# EAGLE board terminal - eagle (EAGLE 4.09)
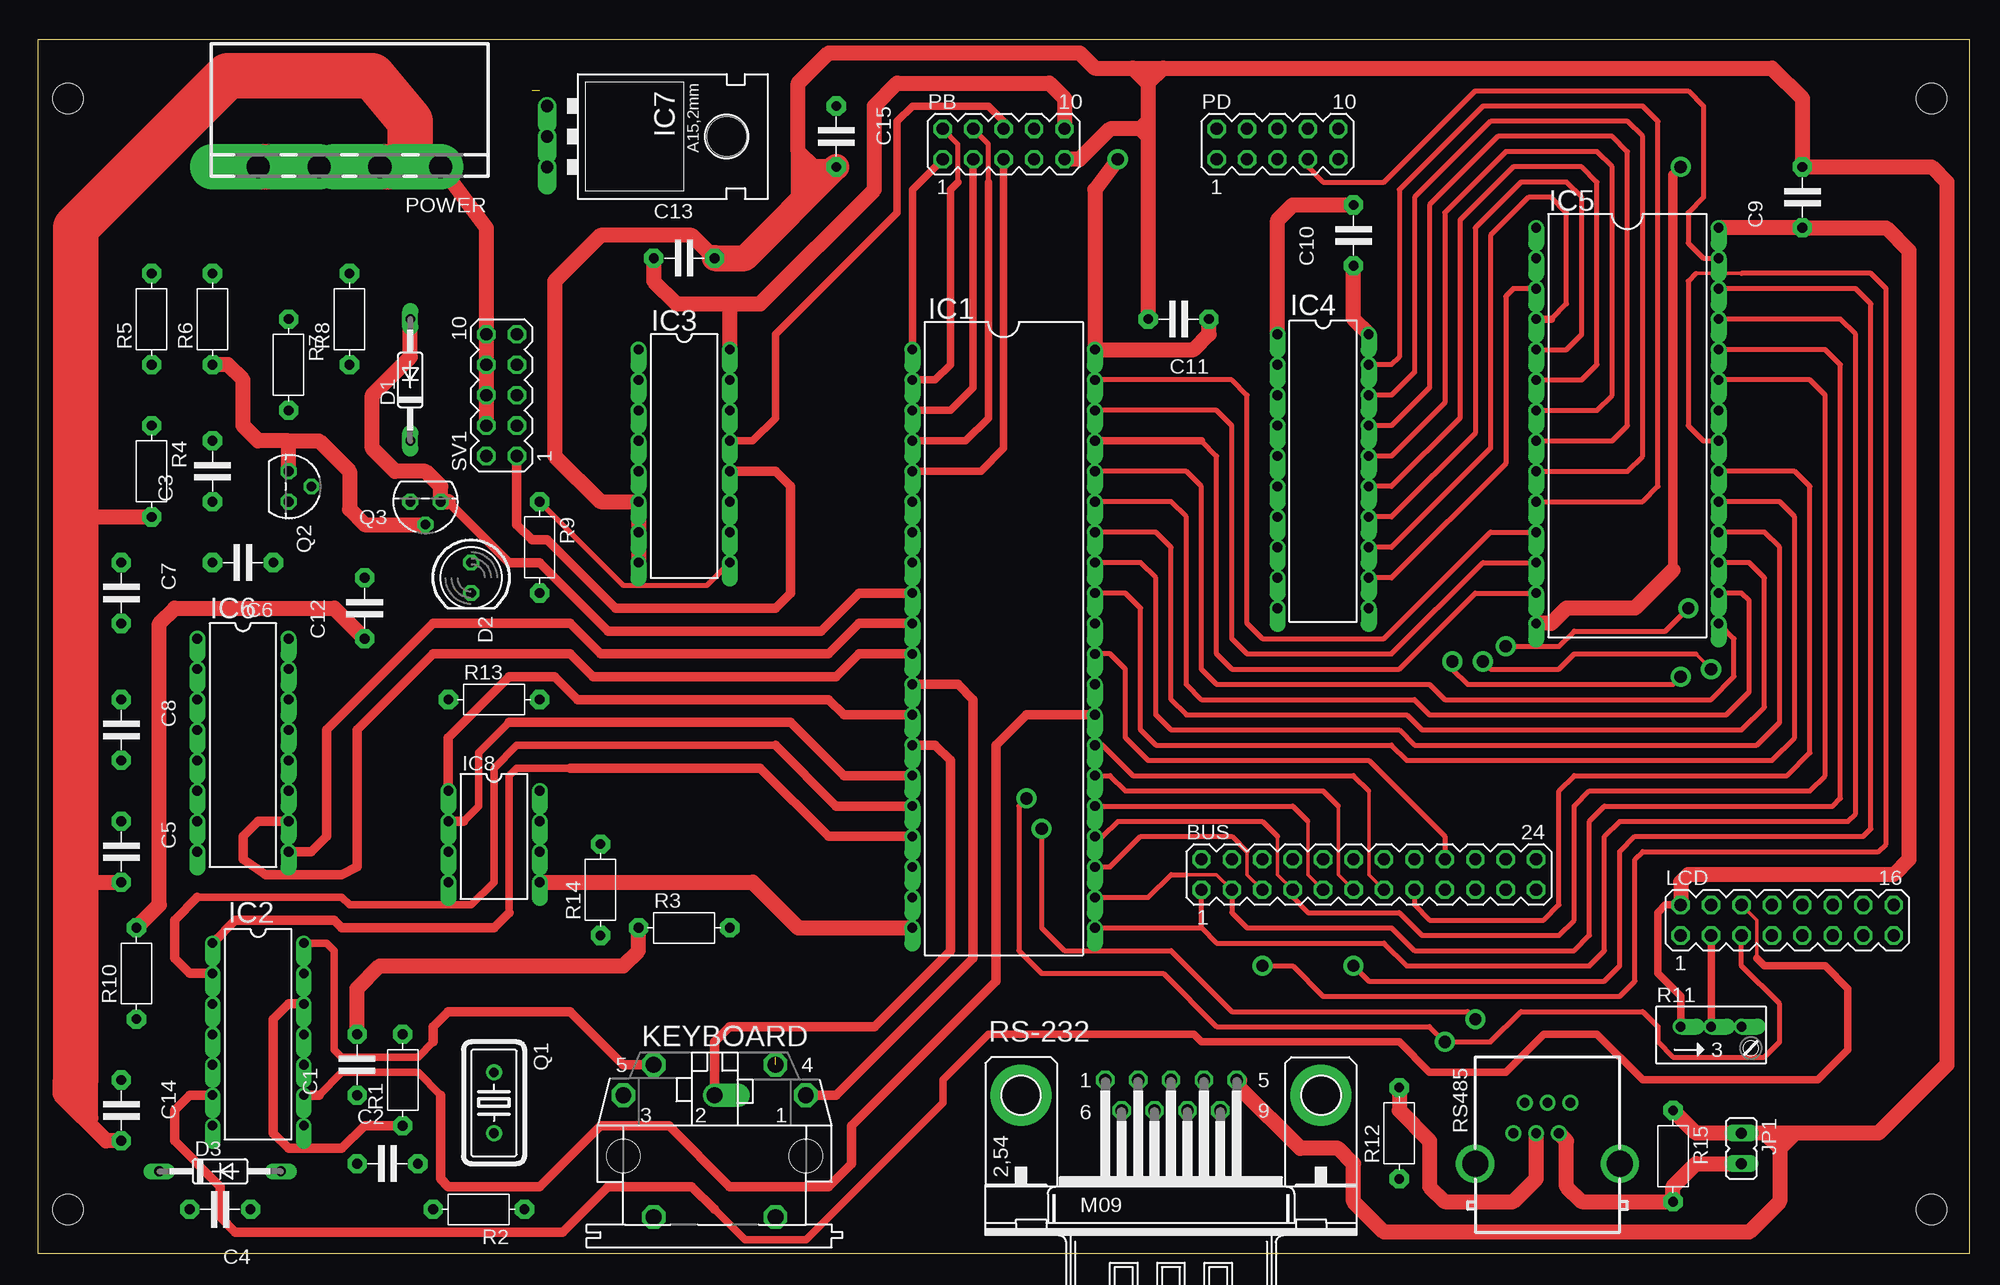
[diagram p0: board, top side]
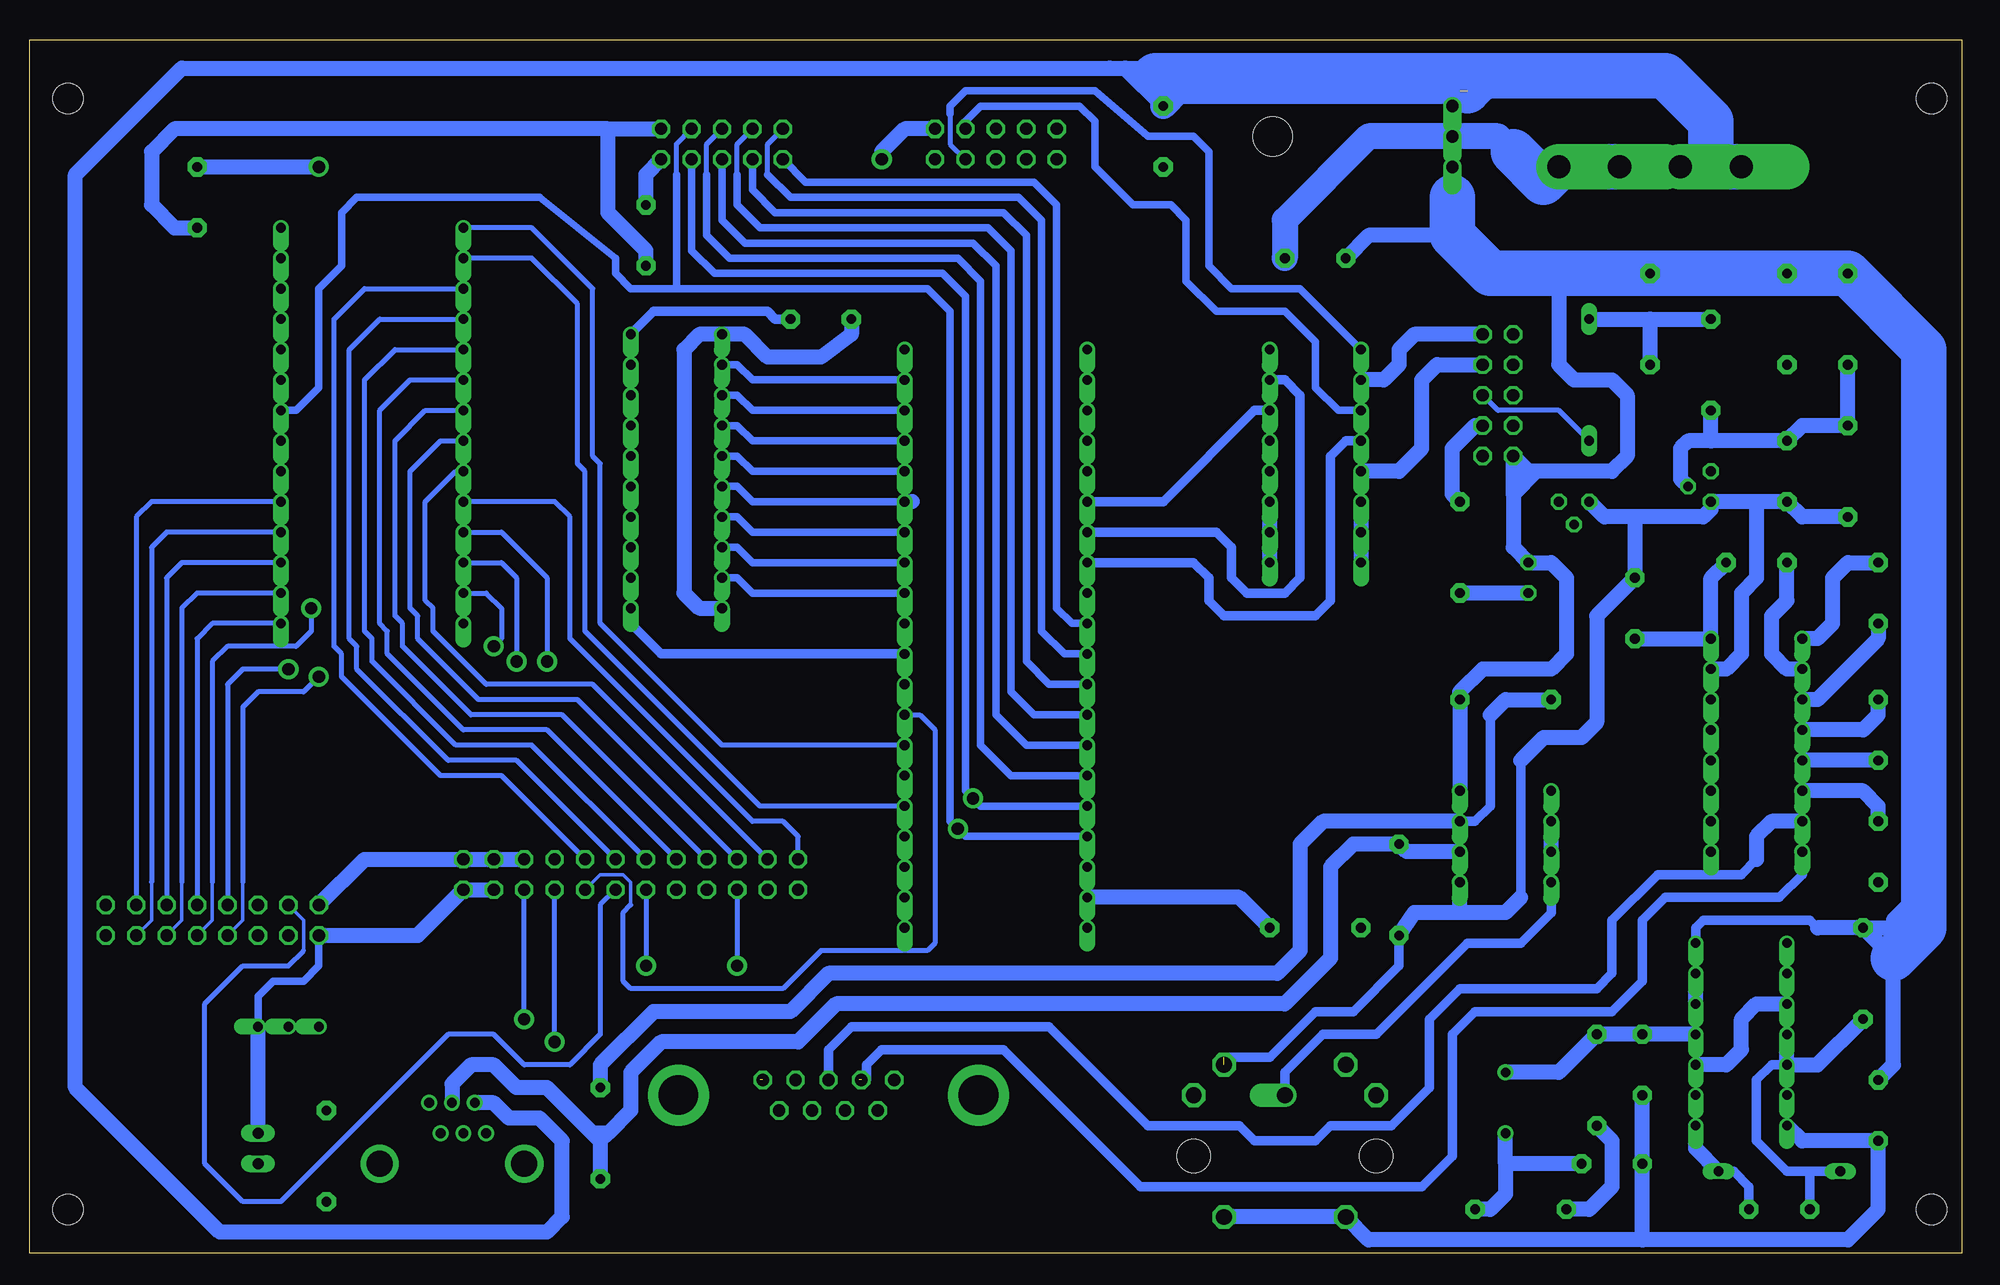
[diagram p1: board, bottom side, seen from below]

Size 161.27 x 101.27 mm. Coordinates in mm from the lower left corner, seen from the top.
Outline: 0,0 161.27,0 161.27,101.27 0,101.27 0,0
Copper layers used: Top, Bottom
Holes 2.54 mm at 2.54,96.36 2.54,3.64 158.11,3.64 158.11,96.36

## Footprints (pad centres in the part's own frame; a part is rotated, then mirrored left to right if it is on the bottom)
MA12-2 = drill 1.016 octagon: 1 -13.97,-1.27; 2 -13.97,1.27; 3 -11.43,-1.27; 4 -11.43,1.27; 5 -8.89,-1.27; 6 -8.89,1.27; 7 -6.35,-1.27; 8 -6.35,1.27; 9 -3.81,-1.27; 10 -3.81,1.27; 11 -1.27,-1.27; 12 -1.27,1.27; 13 1.27,-1.27; 14 1.27,1.27; 15 3.81,-1.27; 16 3.81,1.27; 17 6.35,-1.27; 18 6.35,1.27; 19 8.89,-1.27; 20 8.89,1.27; 21 11.43,-1.27; 22 11.43,1.27; 23 13.97,-1.27; 24 13.97,1.27
C-5 = drill 0.813 pad 1.6 octagon: 1 -2.54,0; 2 2.54,0
DO35-10 = drill 0.813 long: A 5.08,0; C -5.08,0
LED5MM = drill 0.813 octagon: A -1.27,0; K 1.27,0
DIL40 = drill 0.813 offset: 1 -24.13,-7.62; 2 -21.59,-7.62; 3 -19.05,-7.62; 4 -16.51,-7.62; 5 -13.97,-7.62; 6 -11.43,-7.62; 7 -8.89,-7.62; 8 -6.35,-7.62; 9 -3.81,-7.62; 10 -1.27,-7.62; 11 1.27,-7.62; 12 3.81,-7.62; 13 6.35,-7.62; 14 8.89,-7.62; 15 11.43,-7.62; 16 13.97,-7.62; 17 16.51,-7.62; 18 19.05,-7.62; 19 21.59,-7.62; 20 24.13,-7.62; 21 24.13,7.62; 22 21.59,7.62; 23 19.05,7.62; 24 16.51,7.62; 25 13.97,7.62; 26 11.43,7.62; 27 8.89,7.62; 28 6.35,7.62; 29 3.81,7.62; 30 1.27,7.62; 31 -1.27,7.62; 32 -3.81,7.62; 33 -6.35,7.62; 34 -8.89,7.62; 35 -11.43,7.62; 36 -13.97,7.62; 37 -16.51,7.62; 38 -19.05,7.62; 39 -21.59,7.62; 40 -24.13,7.62
DIL14 = drill 0.8 offset: 1 -7.62,-3.81; 2 -5.08,-3.81; 3 -2.54,-3.81; 4 0,-3.81; 5 2.54,-3.81; 6 5.08,-3.81; 7 7.62,-3.81; 8 7.62,3.81; 9 5.08,3.81; 10 2.54,3.81; 11 0,3.81; 12 -2.54,3.81; 13 -5.08,3.81; 14 -7.62,3.81
DIL16 = drill 0.813 offset: 1 -8.89,-3.81; 2 -6.35,-3.81; 3 -3.81,-3.81; 4 -1.27,-3.81; 5 1.27,-3.81; 6 3.81,-3.81; 7 6.35,-3.81; 8 8.89,-3.81; 9 8.89,3.81; 10 6.35,3.81; 11 3.81,3.81; 12 1.27,3.81; 13 -1.27,3.81; 14 -3.81,3.81; 15 -6.35,3.81; 16 -8.89,3.81
DIL20 = drill 0.813 offset: 1 -11.43,-3.81; 2 -8.89,-3.81; 3 -6.35,-3.81; 4 -3.81,-3.81; 5 -1.27,-3.81; 6 1.27,-3.81; 7 3.81,-3.81; 8 6.35,-3.81; 9 8.89,-3.81; 10 11.43,-3.81; 11 11.43,3.81; 12 8.89,3.81; 13 6.35,3.81; 14 3.81,3.81; 15 1.27,3.81; 16 -1.27,3.81; 17 -3.81,3.81; 18 -6.35,3.81; 19 -8.89,3.81; 20 -11.43,3.81
DIL28-6 = drill 0.813 offset: 1 -16.51,-7.62; 2 -13.97,-7.62; 3 -11.43,-7.62; 4 -8.89,-7.62; 5 -6.35,-7.62; 6 -3.81,-7.62; 7 -1.27,-7.62; 8 1.27,-7.62; 9 3.81,-7.62; 10 6.35,-7.62; 11 8.89,-7.62; 12 11.43,-7.62; 13 13.97,-7.62; 14 16.51,-7.62; 15 16.51,7.62; 16 13.97,7.62; 17 11.43,7.62; 18 8.89,7.62; 19 6.35,7.62; 20 3.81,7.62; 21 1.27,7.62; 22 -1.27,7.62; 23 -3.81,7.62; 24 -6.35,7.62; 25 -8.89,7.62; 26 -11.43,7.62; 27 -13.97,7.62; 28 -16.51,7.62
78XXL = drill 1.016 offset: GND 0,-3.81; IN -2.54,-3.81; OUT 2.54,-3.81 | hole 3.302: 0,11.176
DIL08 = drill 0.813 offset: 1 -3.81,-3.81; 2 -1.27,-3.81; 3 1.27,-3.81; 4 3.81,-3.81; 5 3.81,3.81; 6 1.27,3.81; 7 -1.27,3.81; 8 -3.81,3.81
JP1 = drill 0.914 long: 1 0,-1.27; 2 0,1.27
MAB5SH = drill 1.321 octagon: 1 7.62,5.08; 3 -7.62,5.08; 4 5.08,7.62; 5 -5.08,7.62; PE -5.08,-5.08; PE@ 5.08,-5.08 | drill 1.321 offset: 2 0,5.08 | hole 2.794: 7.62,0; -7.62,0
MA08-2 = drill 1.016 octagon: 1 -8.89,-1.27; 2 -8.89,1.27; 3 -6.35,-1.27; 4 -6.35,1.27; 5 -3.81,-1.27; 6 -3.81,1.27; 7 -1.27,-1.27; 8 -1.27,1.27; 9 1.27,-1.27; 10 1.27,1.27; 11 3.81,-1.27; 12 3.81,1.27; 13 6.35,-1.27; 14 6.35,1.27; 15 8.89,-1.27; 16 8.89,1.27
MA05-2 = drill 1.016 octagon: 1 -5.08,-1.27; 2 -5.08,1.27; 3 -2.54,-1.27; 4 -2.54,1.27; 5 0,-1.27; 6 0,1.27; 7 2.54,-1.27; 8 2.54,1.27; 9 5.08,-1.27; 10 5.08,1.27
FLOP-4V = drill 1.93 pad 3.81 offset: 1 7.62,0; 2 2.54,0; 3 -2.54,0; 4 -7.62,0
HC18U-V = drill 0.813 round: 1 -2.54,0; 2 2.54,0
TO92 = drill 0.813 octagon: 1 1.27,0; 2 0,1.905; 3 -1.27,0
R-7,5 = drill 0.813 pad 1.6 octagon: 1 -3.81,0; 2 3.81,0
RJ9W = drill 0.813 offset: A 2.54,0.635; E -2.54,0.635; S 0,0.635
RJ11V = drill 0.813 pad 1.27 round: 1 -5.08,0.635; 2 -2.54,-0.318; 3 -5.08,-1.27; 4 -2.54,-2.223; 5 -5.08,-3.175; 6 -2.54,-4.128 | drill 2.184 pad 2.54 round: P$1 -7.62,3.81; P$3 -7.62,-8.255
M09HP = drill 1.016 octagon: 1 -5.486,1.27; 2 -2.743,1.27; 3 0,1.27; 4 2.743,1.27; 5 5.486,1.27; 6 -4.115,-1.27; 7 -1.372,-1.27; 8 1.372,-1.27; 9 4.115,-1.27 | drill 3.302 pad 5.08 round: G1 -12.522,0; G2 12.522,0

## Placement (x,y rotation side)
BUS  [MA12-2]  111.12,31.58 0 top
C1  27pF  [C-5]  26.67,15.71 90 top
C2  150pF  [C-5]  29.21,7.46 0 top
C3  100nF  [C-5]  14.6,65.24 90 top
C4  33pF  [C-5]  15.23,3.64 180 top
C5  10uF x 25V  [C-5]  6.98,33.49 270 top
C6  10uF x 25V  [C-5]  17.14,57.62 180 top
C7  10uF x 25V  [C-5]  6.98,55.08 270 top
C8  10uF x 25V  [C-5]  6.98,43.65 270 top
C9  1uF  [C-5]  147.31,88.1 90 top
C10  1uF  [C-5]  109.85,84.92 90 top
C11  1uF  [C-5]  95.25,77.94 180 top
C12  1uF  [C-5]  27.3,53.81 90 top
C13  1uF  [C-5]  53.97,83.02 0 top
C14  1uF  [C-5]  6.98,11.9 270 top
C15  1uF  [C-5]  66.67,93.18 270 top
D1  1N4148  [DO35-10]  31.11,72.86 90 top
D2  [LED5MM]  36.19,56.35 270 top
D3  1N4148  [DO35-10]  15.23,6.82 0 top
IC1  AT90S8515P  [DIL40]  80.64,51.27 270 top
IC2  74AS00N  [DIL14]  18.41,18.25 270 top
IC3  4053N  [DIL16]  53.97,66.51 270 top
IC4  74HC573N  [DIL20]  107.31,65.24 270 top
IC5  [DIL28-6]  132.71,69.05 270 top
IC6  MAX202CPE  [DIL16]  17.14,42.38 270 top
IC7  [78XXL]  46.35,93.18 270 top
IC8  MAX481CPA  [DIL08]  38.09,34.76 270 top
JP1  [JP1]  142.23,8.73 180 top
KEYBOARD  [MAB5SH]  56.51,8.09 0 top
LCD  [MA08-2]  146.04,27.77 0 top
PB  [MA05-2]  80.64,92.55 0 top
PD  [MA05-2]  103.5,92.55 0 top
POWER  [FLOP-4V]  26.03,90.64 180 top
Q1  4MHz  [HC18U-V]  38.09,12.54 270 top
Q2  BC337  [TO92]  20.95,63.97 270 top
Q3  BC337  [TO92]  32.38,62.7 180 top
R1  82k  [R-7,5]  30.48,14.44 90 top
R2  2k  [R-7,5]  36.82,3.64 180 top
R3  100  [R-7,5]  53.97,27.14 0 top
R4  6.8k  [R-7,5]  9.52,65.24 270 top
R5  43k  [R-7,5]  9.52,77.94 90 top
R6  10k  [R-7,5]  14.6,77.94 90 top
R7  1M  [R-7,5]  20.95,74.13 270 top
R8  10k  [R-7,5]  26.03,77.94 90 top
R9  150  [R-7,5]  41.91,58.89 270 top
R10  10k  [R-7,5]  8.25,23.33 90 top
R11  TRIM_EU-RJ9W  [RJ9W]  139.69,18.25 0 top
R12  120  [R-7,5]  113.66,10 90 top
R13  560  [R-7,5]  38.09,46.19 0 top
R14  560  [R-7,5]  46.98,30.31 90 top
R15  100  [R-7,5]  136.52,8.09 270 top
RS485  [RJ11V]  123.82,15.08 90 top
RS-232  DB9-MALE  [M09HP]  94.61,13.17 0 top
SV1  ISP  [MA05-2]  38.73,71.59 90 top

## Library data of the parts
BUS LCD PB PD SV1 = con-lstb
C1-C15 R1-R10 R12-R15 = discrete
D1 D3 = diode
D2 = led
IC1 = atmel
IC2 = 74xx-eu
IC3 = 40xx
IC4 = 74xx-us
IC5 = memory-hitachi
IC6 IC8 = maxim
IC7 = v-reg
JP1 = jumper
KEYBOARD = con-din
POWER = con-amp
Q1 = crystal
Q2 Q3 = transistor-npn
R11 = pot
RS485 = con-rj
RS-232 = con-subd

## Nets
(MISO)PB6: IC1.7 IC3.15
(MOSI)PB5: IC1.6 IC3.14
(SCK)PB7: IC1.8 IC3.4
+5V: BUS.20 BUS.22 BUS.24 C6.1 C9.1 C10.1 C11.1 C12.1 C13.1 C14.1 D2.A IC1.40 IC2.14 IC3.16 IC4.20 IC5.28 IC6.16 IC7.OUT IC8.8 KEYBOARD.5 LCD.2 PB.10 PD.10 R5.2 R6.2 R8.2 R10.2 R11.E R13.2 SV1.2
A: IC8.6 R12.1 R14.2 RS485.4
A0: BUS.2 IC4.19 IC5.10
A1: BUS.4 IC4.18 IC5.9
A2: BUS.6 IC4.17 IC5.8
A3: BUS.8 IC4.16 IC5.7
A4: BUS.10 IC4.15 IC5.6
A5: BUS.12 IC4.14 IC5.5
A6: BUS.14 IC4.13 IC5.4
A7: BUS.16 IC4.12 IC5.3
A8: BUS.1 IC1.21 IC5.25
A9: BUS.3 IC1.22 IC5.24
A10: BUS.5 IC1.23 IC5.21
A11: BUS.7 IC1.24 IC5.23
A12: BUS.9 IC1.25 IC5.2
A13: BUS.11 IC1.26 IC5.26
A14: BUS.13 IC1.27 IC5.1 LCD.4
A15: BUS.15 IC1.28 IC2.9 IC5.20
AD0: IC1.39 IC4.2 IC5.11 LCD.7
AD1: IC1.38 IC4.3 IC5.12 LCD.8
AD2: IC1.37 IC4.4 IC5.13 LCD.9
AD3: IC1.36 IC4.5 IC5.15 LCD.10
AD4: IC1.35 IC4.6 IC5.16 LCD.11
AD5: IC1.34 IC4.7 IC5.17 LCD.12
AD6: IC1.33 IC4.8 IC5.18 LCD.13
AD7: IC1.32 IC4.9 IC5.19 LCD.14
ALE: BUS.18 IC1.30 IC4.11
B: IC8.7 R12.2 R13.1 RS485.3
CLK: IC1.19 R3.2
CONT: LCD.3 R11.S
ENABLE: IC2.6 LCD.6
LED_ENABLE: IC3.9 IC3.10 IC3.11 R9.1 SV1.3
MISO: IC3.2 SV1.9
MOSI: IC3.12 SV1.1
N$1: IC2.12 IC2.13 R1.1 R2.2
N$2: IC2.3 IC2.10
N$3: C4.1 D3.A IC2.8
N$4: C2.2 Q1.2 R2.1
N$5: D2.K R9.2
N$6: C1.2 IC2.11 Q1.1 R1.2 R3.1
N$7: Q2.3 Q3.2 R6.1
N$9: C3.2 Q2.2 R4.1 R5.1 R7.2
N$11: C7.1 IC6.1
N$12: C7.2 IC6.3
N$13: C4.2 D3.C IC2.4 IC2.5 R10.1
N$14: C8.1 IC6.4
N$15: C8.2 IC6.5
P-RESET: D1.C SV1.5
PB0: IC1.1 PB.1
PB1: IC1.2 PB.2
PB2: IC1.3 PB.3
PB3: IC1.4 PB.4
PB4: IC1.5 PB.5
PB5: IC3.13 PB.6
PB6: IC3.1 PB.7
PB7: IC3.3 PB.8
PD0: IC1.10 IC6.9 PD.1
PD1: IC1.11 IC6.10 PD.2
PD2: IC1.12 KEYBOARD.1 PD.3
PD3: IC1.13 IC8.1 PD.4
PD4: IC1.14 IC8.4 KEYBOARD.2 PD.5
PD5: IC1.15 IC8.2 IC8.3 PD.6
PD6: BUS.17 IC1.16 IC2.2 IC5.27 LCD.5 PD.7
PD7: BUS.19 IC1.17 IC2.1 IC5.22 PD.8
PE: BUS.21 BUS.23 C1.1 C2.1 C3.1 C5.2 C9.2 C10.2 C11.2 C12.2 C13.2 C14.2 C15.2 IC1.20 IC2.7 IC3.6 IC3.7 IC3.8 IC4.1 IC4.10 IC5.14 IC6.15 IC7.GND IC8.5 JP1.1 KEYBOARD.4 KEYBOARD.PE KEYBOARD.PE@ LCD.1 PB.9 PD.9 POWER.3 POWER.4 Q2.1 Q3.1 R4.2 R11.A R14.1 R15.1 RS-232.5 SV1.4 SV1.6 SV1.8 SV1.10
RST: D1.A IC1.9 Q3.3 R7.1 R8.1
RTN: JP1.2 R15.2 RS485.5
RX: IC6.8 RS-232.2
SCK: IC3.5 SV1.7
TX: IC6.7 RS-232.3
V+: C6.2 IC6.2
V-: C5.1 IC6.6
VCC: C15.1 IC7.IN POWER.1 POWER.2 RS485.2

## Tracks (layer width: path | path; a pad name or v marks a point on that pad's centre or on a via)
(MISO)PB6
  Bottom 0.813: IC3.15 56.51,72.86 55.24,71.59 55.24,56.35 56.51,55.08 59.68,55.08 60.95,56.35 60.95,58.89 62.22,60.16 IC1.7
(MOSI)PB5
  Bottom 0.813: IC3.14 59.05,70.32 66.67,62.7 IC1.6
(SCK)PB7
  Bottom 0.813: IC3.4 51.43,67.78 52.7,66.51 52.7,54.45 53.97,53.17 61.59,53.17 62.86,54.45 62.86,56.35 64.13,57.62 IC1.8
+5V  (via drill 1.02 pad 1.68)
  Top 0.61: 33.02,17.61 31.75,16.34 25.39,16.34 24.76,16.98 24.76,25.23 24.12,25.87 IC2.14 | R11.E 137.16,21.42 135.25,23.33 135.25,28.41 135.88,29.04 LCD.2
  Top 0.813: KEYBOARD.5 48.89,15.71 44.45,20.15 34.28,20.15 33.02,18.88 33.02,17.61
  Top 1.27: C12.1 24.76,53.81 11.43,53.81 10.16,52.54 10.16,29.04 R10.2 | C13.1 51.43,81.11 53.34,79.21 57.78,79.21 | 57.78,79.21 IC3.16 | 57.78,79.21 60.32,79.21 69.84,88.73 69.84,95.72 71.75,97.62 84.45,97.62 85.72,96.36 PB.10 | IC5.28 C9.1 154.3,85.56 156.2,83.66 156.2,32.85 154.94,31.58 137.79,31.58 137.16,30.95 LCD.2 | C11.1 97.78,76.67 96.52,75.4 IC1.40 88.26,88.73 v90.16,91.28 | C10.1 109.85,77.94 IC4.20
  Bottom 0.813: IC2.14 22.22,27.14 21.59,27.77 12.7,27.77 12.06,27.14 | C11.1 99.05,77.94 99.69,78.58 109.22,78.58 IC4.20
  Bottom 1.27: R6.2 R5.2 R6.2 | R6.2 R8.2 | C6.1 20.95,56.35 IC6.16 C12.1 | R10.2 12.06,27.14 | 42.54,89.37 IC7.OUT 42.54,87.47 | C14.1 5.71,15.71 5.71,24.6 R10.2 | 36.19,65.24 SV1.2 37.46,65.24 | 35.55,65.24 29.21,65.24 27.94,66.51 27.94,71.59 29.21,72.86 32.38,72.86 33.65,74.13 33.65,81.75 | 35.55,65.24 36.19,65.24 | R10.2 5.71,27.14 | 37.46,63.34 37.46,65.24 | 37.46,63.34 37.46,58.89 D2.A 34.28,57.62 33.02,56.35 33.02,50 34.28,48.73 40,48.73 41.91,46.82 R13.2 IC8.8 | 36.19,65.24 37.46,65.24 | 35.55,65.24 37.46,63.34 | C13.1 49.52,84.92 42.54,84.92 | BUS.20 BUS.22 BUS.24 133.34,32.85 LCD.2 | C10.1 109.85,83.66 113.02,86.83 113.02,93.81 | PB.10 88.26,93.81 90.16,91.91 v90.16,91.28 | C9.1 149.22,85.56 151.12,87.47 151.12,91.91 149.22,93.81 113.02,93.81 | 113.02,93.81 PD.10
  Bottom 3.81: 42.54,88.1 42.54,87.47 42.54,84.92 39.36,81.75 33.65,81.75 R8.2 R6.2 R5.2 3.17,75.4 3.17,27.14 5.71,24.6
A
  Bottom 1.27: IC8.6 46.35,33.49 R14.2 50.79,34.12 52.7,32.22 52.7,24.6 56.51,20.79 93.97,20.79 97.15,17.61 108.58,17.61 111.12,15.08 111.12,11.9 113.02,10 | 113.02,10 113.66,9.36 | 113.66,9.36 R12.1 | 113.66,9.36 114.3,10 | 114.3,10 118.11,13.81 120.64,13.81 122.55,15.71 124.45,15.71 126.04,14.12 RS485.4 | 113.02,10 114.3,10
A0
  Top 0.406: IC5.10 133.98,62.7 135.25,63.97 135.25,94.45 133.98,95.72 120.64,95.72 113.66,88.73 113.66,74.77 113.02,74.13 IC4.19
  Bottom 0.406: IC5.10 117.47,62.7 116.2,61.43 116.2,51.27 100.96,36.03 98.42,36.03 97.15,34.76 BUS.2
A1
  Top 0.406: IC5.9 132.71,65.24 133.98,66.51 133.98,93.18 132.71,94.45 121.28,94.45 114.93,88.1 114.93,73.5 113.02,71.59 IC4.18
  Bottom 0.406: IC5.9 125.72,65.24 128.27,62.7 128.27,54.45 127.63,53.81 127.63,51.91 123.19,47.46 114.3,47.46 BUS.4
A2
  Top 0.406: IC5.8 131.44,67.78 132.71,69.05 132.71,91.91 131.44,93.18 121.91,93.18 116.2,87.47 116.2,72.22 113.02,69.05 IC4.17
  Bottom 0.406: IC5.8 127,67.78 129.53,65.24 129.53,53.81 128.9,53.17 128.9,51.27 123.82,46.19 115.56,46.19 BUS.6
A3
  Top 0.406: IC5.7 130.17,70.32 131.44,71.59 131.44,90.64 130.17,91.91 122.55,91.91 117.47,86.83 117.47,70.95 113.02,66.51 IC4.16
  Bottom 0.406: IC5.7 128.27,70.32 130.81,67.78 130.81,53.17 130.17,52.54 130.17,50.63 124.45,44.92 116.83,44.92 BUS.8
A4
  Top 0.406: IC5.6 128.9,72.86 130.17,74.13 130.17,89.37 128.9,90.64 123.19,90.64 118.74,86.19 118.74,69.69 113.02,63.97 IC4.15
  Bottom 0.406: IC5.6 129.53,72.86 132.08,70.32 132.08,52.54 131.44,51.91 131.44,50 125.09,43.65 118.11,43.65 BUS.10
A5
  Top 0.406: IC5.5 127.63,75.4 128.9,76.67 128.9,88.1 127.63,89.37 123.82,89.37 120.01,85.56 120.01,68.41 113.02,61.43 IC4.14
  Bottom 0.406: IC5.5 130.81,75.4 133.34,72.86 133.34,51.91 132.71,51.27 132.71,49.37 125.72,42.38 119.38,42.38 BUS.12
A6
  Top 0.406: 126.36,77.94 127.63,79.21 127.63,86.83 126.36,88.1 124.45,88.1 121.28,84.92 121.28,67.14 113.02,58.89 IC4.13
  Top 0.61: IC5.4 126.36,77.94
  Bottom 0.406: IC5.4 132.08,77.94 134.62,75.4 134.62,51.27 133.98,50.63 133.98,48.73 126.36,41.11 120.64,41.11 BUS.14
A7
  Top 0.406: IC5.3 123.19,80.48 122.55,79.84 122.55,65.88 113.02,56.35 IC4.12
  Bottom 0.406: IC5.3 133.34,80.48 135.88,77.94 135.88,50.63 135.25,50 135.25,48.09 127,39.84 121.91,39.84 BUS.16
A8
  Top 0.406: IC1.21 97.15,27.14 | IC5.25 150.49,77.94 151.76,76.67 151.76,36.66 151.12,36.03 132.08,36.03 130.81,34.76 130.81,25.23 129.53,23.96 114.3,23.96 112.39,25.87 98.42,25.87 97.15,27.14 | 97.15,27.14 BUS.1
A9
  Top 0.305: 95.88,31.58 98.42,31.58 BUS.3
  Top 0.406: 95.88,31.58 94.61,31.58 92.7,29.68 IC1.22 | IC5.24 149.22,75.4 150.49,74.13 150.49,37.94 149.85,37.3 130.81,37.3 129.53,36.03 129.53,26.5 128.27,25.23 114.93,25.23 113.02,27.14 100.96,27.14 99.69,28.41 BUS.3
A10  (via drill 1.02 pad 1.68)
  Top 0.305: 100.96,33.49 100.96,31.58 BUS.5 | 142.23,81.75 138.43,81.75
  Top 0.406: IC1.23 89.53,32.22 92.07,34.76 99.69,34.76 100.96,33.49 | IC5.21 139.06,67.78 137.79,69.05 137.79,81.11 138.43,81.75 | 142.23,81.75 153.03,81.75 154.3,80.48 154.3,34.12 153.66,33.49 133.98,33.49 133.34,32.85 133.34,22.7 132.08,21.42 107.31,21.42 104.77,23.96 v102.23,23.96
  Bottom 0.406: BUS.5 v102.23,23.96
A11
  Top 0.305: 103.5,34.76 103.5,31.58 BUS.7
  Top 0.406: IC1.24 88.89,34.76 90.16,36.03 102.23,36.03 103.5,34.76 | IC5.23 147.95,72.86 149.22,71.59 149.22,39.84 147.95,38.57 129.53,38.57 128.27,37.3 128.27,27.77 127,26.5 115.56,26.5 113.66,28.41 106.04,28.41 104.77,29.68 BUS.7
A12
  Top 0.305: 106.04,36.03 106.04,31.58 BUS.9
  Top 0.406: IC1.25 104.77,37.3 106.04,36.03
  Bottom 0.406: IC1.25 100.33,37.3 114.93,51.91 114.93,65.24 115.56,65.88 115.56,79.21 119.38,83.02 IC5.2
A13  (via drill 1.02 pad 1.68)
  Top 0.305: 108.58,37.3 108.58,31.58 BUS.11
  Top 0.406: IC1.26 89.53,39.84 90.8,38.57 107.31,38.57 108.58,37.3 | v109.85,23.96 111.12,22.7 130.81,22.7 132.08,23.96 132.08,33.49 133.34,34.76 152.4,34.76 153.03,35.39 153.03,79.21 151.76,80.48 IC5.26
  Bottom 0.406: BUS.11 v109.85,23.96
A14
  Top 0.305: 111.12,38.57 111.12,31.58 BUS.13
  Top 0.406: IC1.27 88.89,42.38 91.44,39.84 109.85,39.84 111.12,38.57
  Bottom 0.305: 138.43,25.23 138.43,27.77 LCD.4
  Bottom 0.406: IC1.27 103.5,42.38 113.66,52.54 113.66,65.88 114.3,66.51 114.3,80.48 119.38,85.56 IC5.1 | BUS.13 113.66,29.04 113.66,18.25 116.2,15.71 120.01,15.71 122.55,18.25 126.36,18.25 140.33,4.28 143.5,4.28 146.68,7.46 146.68,20.79 143.5,23.96 139.69,23.96 138.43,25.23
A15
  Top 0.406: IC5.20 146.68,65.24 147.95,63.97 147.95,41.74 146.04,39.84 128.27,39.84 127,38.57 127,29.04 125.72,27.77 116.2,27.77 114.93,29.04 BUS.15
  Top 0.61: 23.49,13.17 25.39,15.08 31.75,15.08 33.65,13.17
  Top 0.813: IC2.9 23.49,13.17 | 33.65,13.17 33.65,6.18 34.28,5.55 41.91,5.55 46.98,10.63 52.7,10.63 57.78,5.55 66.03,5.55 67.94,7.46 67.94,10.63 80,22.7 80,42.38 82.55,44.92 IC1.28
  Bottom 0.305: 111.12,29.04 111.12,30.95 111.75,31.58 113.66,31.58 BUS.15
  Bottom 0.406: 111.12,29.04 111.75,28.41 111.75,22.7 111.12,22.06 98.42,22.06 95.25,25.23 86.36,25.23 85.72,25.87 85.72,43.65 86.99,44.92 IC1.28
AD0  (via drill 1.02 pad 1.68)
  Top 0.305: v118.11,49.37 118.11,48.73 | 136.52,47.46 v137.16,48.09
  Top 0.406: IC1.39 99.69,72.86 100.96,71.59 100.96,52.54 102.23,51.27 112.39,51.27 121.28,60.16 IC5.11 | 118.11,48.73 119.38,47.46 136.52,47.46
  Bottom 0.305: 143.5,30.95 143.5,27.77 LCD.7
  Bottom 0.406: IC5.11 121.91,60.16 118.11,56.35 v118.11,49.37 | v137.16,48.09 138.43,46.82 142.23,46.82 143.5,45.55 143.5,30.95
  Bottom 0.61: IC1.39 100.96,72.86 102.23,74.13 IC4.2
AD1  (via drill 1.02 pad 1.68)
  Top 0.305: 138.43,50 v139.69,48.73
  Top 0.406: IC1.38 98.42,70.32 99.69,69.05 99.69,51.27 100.96,50 113.02,50 120.64,57.62 IC5.12 | v120.64,49.37 121.28,48.73 127,48.73 128.27,50 138.43,50
  Bottom 0.406: IC5.12 121.91,57.62 120.64,56.35 v120.64,49.37 | v139.69,48.73 143.5,48.73 144.78,47.46 LCD.8
  Bottom 0.61: IC1.38 100.96,70.32 102.23,71.59 IC4.3
AD2  (via drill 1.02 pad 1.68)
  Top 0.406: 97.15,67.78 98.42,66.51 98.42,50 99.69,48.73 113.66,48.73 120.01,55.08 IC5.13 | v122.55,50.63 127,50.63 128.27,51.91 135.88,51.91 v137.79,53.81
  Top 0.61: 97.15,67.78 IC1.37
  Bottom 0.305: 146.04,30.95 146.04,27.77 LCD.9
  Bottom 0.406: IC5.13 123.19,55.08 121.91,53.81 121.91,51.27 v122.55,50.63 | v137.79,53.81 137.79,51.91 139.06,50.63 144.78,50.63 146.04,49.37 146.04,30.95
  Bottom 0.61: IC1.37 100.96,67.78 102.23,69.05 IC4.4
AD3
  Top 0.406: IC1.36 95.88,65.24 97.15,63.97 97.15,48.73 98.42,47.46 116.2,47.46 117.47,46.19 139.69,46.19 141.6,48.09 141.6,51.27 IC5.15
  Bottom 0.406: IC5.15 146.04,52.54 147.31,51.27 LCD.10
  Bottom 0.61: IC1.36 100.96,65.24 102.23,66.51 IC4.5
AD4
  Top 0.406: IC1.35 94.61,62.7 95.88,61.43 95.88,47.46 97.15,46.19 114.93,46.19 116.2,44.92 140.97,44.92 142.87,46.82 142.87,54.45 142.23,55.08 IC5.16
  Bottom 0.305: 148.59,30.95 148.59,27.77 LCD.11
  Bottom 0.406: IC5.16 147.31,55.08 148.59,53.81 148.59,30.95
  Bottom 0.61: IC1.35 100.96,62.7 102.23,63.97 IC4.6
  Bottom 1.27: IC1.35 87.62,62.7
AD5
  Top 0.406: IC1.34 93.34,60.16 94.61,58.89 94.61,46.19 95.88,44.92 114.3,44.92 115.56,43.65 142.23,43.65 144.14,45.55 144.14,56.35 142.87,57.62 IC5.17
  Bottom 0.406: IC5.17 148.59,57.62 149.85,56.35 LCD.12
  Bottom 0.61: IC1.34 100.96,60.16 102.23,61.43 IC4.7
AD6
  Top 0.406: IC1.33 92.07,57.62 93.34,56.35 93.34,44.92 94.61,43.65 113.66,43.65 114.93,42.38 143.5,42.38 145.41,44.28 145.41,58.89 144.14,60.16 IC5.18
  Bottom 0.305: 151.12,30.95 151.12,27.77 LCD.13
  Bottom 0.406: IC5.18 149.85,60.16 151.12,58.89 151.12,30.95
  Bottom 0.61: IC1.33 100.96,57.62 102.23,58.89 IC4.8
AD7
  Top 0.406: IC1.32 90.8,55.08 92.07,53.81 92.07,43.65 93.34,42.38 113.02,42.38 114.3,41.11 144.78,41.11 146.68,43.02 146.68,61.43 145.41,62.7 IC5.19
  Bottom 0.406: IC5.19 151.12,62.7 152.4,61.43 LCD.14
  Bottom 0.61: IC1.32 100.96,55.08 102.23,56.35 IC4.9
ALE
  Top 0.406: BUS.18 117.47,34.76 111.12,41.11 92.7,41.11 90.8,43.02 90.8,48.73 89.53,50 IC1.30
  Bottom 0.813: IC1.30 108.58,50 111.12,52.54 IC4.11
B
  Top 1.27: R12.2 113.66,11.9 116.2,9.36 116.2,5.55 117.47,4.28 123.19,4.28 125.09,6.18 RS485.3
  Bottom 0.813: IC8.7 40.63,36.03 39.36,37.3 39.36,44.92
  Bottom 1.27: 39.36,44.92 38.09,46.19 R13.1 | IC8.7 53.34,36.03 55.24,34.12 55.24,25.23 57.14,23.33 94.61,23.33 97.78,20.15 109.22,20.15 113.66,15.71 R12.2
CLK
  Bottom 1.27: R3.2 60.32,29.68 IC1.19
CONT
  Top 0.61: R11.S LCD.3
ENABLE
  Top 0.305: 143.5,24.6 143.5,27.77 LCD.6
  Top 0.61: 56.51,3.64 59.05,1.1 64.13,1.1 75.56,12.54 75.56,14.44 79.37,18.25 96.52,18.25 97.15,17.61 113.66,17.61 116.2,15.08 122.55,15.08 125.72,18.25 130.17,18.25 133.98,14.44 148.59,14.44 151.12,16.98 151.12,22.06 149.22,23.96 144.14,23.96 143.5,24.6
  Top 0.813: IC2.6 12.7,13.17 11.43,11.9 11.43,9.36 15.23,5.55 15.23,3.01 16.5,1.74 43.81,1.74 47.62,5.55 54.6,5.55 56.51,3.64
LED_ENABLE
  Top 0.406: R9.1 48.89,55.71 55.88,55.71 IC3.9 IC3.11
  Bottom 1.27: R9.1 42.54,63.34 42.54,67.14 40.63,69.05 SV1.3 | IC3.11 IC3.10 IC3.9
MISO
  Bottom 1.27: SV1.9 45.71,76.67 46.98,75.4 46.98,74.13 48.25,72.86 IC3.2
MOSI
  Top 0.813: SV1.1 40,60.8 41.27,59.52 42.54,59.52 48.25,53.81 61.59,53.81 62.86,55.08 62.86,63.97 61.59,65.24 IC3.12
N$1
  Top 0.813: R1.1 27.3,10.63 25.39,8.73 20.95,8.73 19.68,10 19.68,19.52 20.95,20.79 IC2.12
  Bottom 1.27: R1.1 29.21,9.36 29.21,5.55 31.11,3.64 R2.2 | IC2.12 IC2.13
N$2
  Bottom 1.27: IC2.3 17.14,20.79 18.41,19.52 18.41,16.98 19.68,15.71 IC2.10
N$3
  Bottom 0.813: C4.1 17.78,5.55 19.05,6.82 D3.A
  Bottom 1.27: D3.A 22.22,8.73 IC2.8
N$4
  Bottom 1.27: 38.09,7.46 Q1.2 | R2.1 39.36,3.64 38.09,4.92 38.09,7.46 | C2.2 38.09,7.46
N$5
  Bottom 1.27: D2.K R9.2
N$6
  Top 1.27: C1.2 26.67,22.06 28.57,23.96 48.89,23.96 50.16,25.23 R3.1
  Bottom 1.27: IC2.11 C1.2 | C1.2 R1.2 | Q1.1 33.65,15.08 R1.2 | C1.2 R1.2
N$7
  Top 1.27: R6.1 15.87,74.13 17.14,72.86 17.14,69.05 18.41,67.78 20.95,67.78 | 20.95,67.78 23.49,67.78 26.03,65.24 26.03,62.06 27.3,60.8 Q3.2 | Q2.3 20.95,67.78
N$8
  Bottom 1.27: 5.71,27.77 4.44,29.04
N$9
  Bottom 1.27: R5.1 R4.1 13.33,69.05 C3.2 20.95,67.78 | 20.95,67.78 R7.2 | Q2.2 23.49,64.61 23.49,67.14 22.86,67.78 20.95,67.78
N$10
  Top 1.27: 4.44,11.27 4.44,14.44
N$11
  Bottom 1.27: C7.1 9.52,57.62 10.79,56.35 10.79,52.54 12.06,51.27 IC6.1
N$12
  Bottom 1.27: IC6.3 12.06,46.19 6.98,51.27 C7.2
N$13  (via drill 0.61)
  Bottom 0.813: C4.2 12.7,6.82 D3.C 14.6,6.82 17.14,9.36 17.14,14.44 15.87,15.71 IC2.5
  Bottom 1.27: R10.1 12.06,15.71 IC2.5 IC2.4
  other vias: 10.16,6.82
N$14
  Bottom 1.27: C8.1 6.98,44.92 8.25,43.65 IC6.4
N$15
  Bottom 1.27: C8.2 IC6.5
N$16
  Top 1.27: 3.81,11.9 3.17,12.54
N$17
  Top 1.27: 64.13,90.64 64.13,90 64.77,89.37
P-RESET
  Bottom 0.406: D1.C 33.65,70.32 38.73,70.32 SV1.5
PB0
  Top 0.61: IC1.1 73.02,88.73 PB.1
PB1
  Top 0.406: 76.83,89.37 76.83,92.55 PB.2
  Top 0.61: IC1.2 74.92,72.86 76.19,74.13 76.19,88.73 76.83,89.37
PB2
  Top 0.61: IC1.3 76.19,70.32 78.1,72.22 PB.3
PB3
  Top 0.406: 79.37,89.37 79.37,92.55 PB.4
  Top 0.61: IC1.4 77.47,67.78 79.37,69.69 79.37,89.37
PB4
  Top 0.61: IC1.5 78.73,65.24 80.64,67.14 PB.5
PB5
  Top 0.61: IC3.13 59.68,67.78 61.59,69.69 61.59,76.67 71.75,86.83 71.75,94.45 73.02,95.72 75.56,95.72 79.37,95.72 80.64,94.45 PB.6
PB6
  Bottom 0.406: PB.7 84.45,92.55 84.45,95.08
  Bottom 0.61: IC3.1 55.24,80.48 60.95,80.48 62.86,82.39 62.86,91.91 64.13,93.18 67.94,93.18 72.38,96.99 83.18,96.99 84.45,95.72 84.45,95.08
PB7
  Bottom 0.61: IC3.3 52.06,70.32 53.97,72.22 53.97,76.03 56.51,78.58 62.22,78.58 64.77,81.11 64.77,86.19 66.03,87.47 69.21,87.47 72.38,90.64 72.38,94.45 73.66,95.72 81.91,95.72 83.18,94.45 PB.8
PD0
  Top 0.813: IC6.9 22.86,33.49 24.12,34.76 24.12,43.65 33.02,52.54 44.45,52.54 46.98,50 66.03,50 68.58,52.54 IC1.10
  Bottom 0.61: IC1.10 74.29,52.54 75.56,53.81 75.56,87.47 77.47,89.37 96.52,89.37 PD.1
PD1
  Top 0.813: IC6.10 18.41,36.03 17.14,34.76 17.14,32.85 19.05,31.58 25.39,31.58 26.67,32.22 26.67,43.65 33.02,50 44.45,50 46.35,48.09 66.67,48.09 68.58,50 IC1.11
  Bottom 0.406: 99.69,90 99.69,92.55 PD.2
  Bottom 0.61: IC1.11 74.92,50 76.83,51.91 76.83,86.19 78.73,88.1 97.78,88.1 99.69,90
PD2
  Top 0.813: KEYBOARD.1 66.67,13.17 78.1,24.6 78.1,46.19 76.83,47.46 IC1.12
  Bottom 0.61: IC1.12 76.19,47.46 78.1,49.37 78.1,84.92 80,86.83 99.05,86.83 100.96,88.73 PD.3
PD3
  Top 0.813: IC8.1 34.28,43.02 39.36,48.09 43.17,48.09 45.08,46.19 66.03,46.19 67.31,44.92 IC1.13
  Bottom 0.406: 102.23,90 102.23,92.55 PD.4
  Bottom 0.61: IC1.13 77.47,44.92 79.37,46.82 79.37,83.66 81.27,85.56 100.33,85.56 102.23,87.47 102.23,90
PD4
  Top 0.813: KEYBOARD.2 56.51,17.61 57.78,18.88 69.84,18.88 76.19,25.23 76.19,41.11 74.92,42.38 IC1.14
  Bottom 0.61: IC1.14 78.1,42.38 80.64,44.92 80.64,82.39 82.55,84.29 101.59,84.29 103.5,86.19 PD.5
  Bottom 0.813: IC8.4 34.28,28.41 36.82,25.87 41.27,25.87 48.89,18.25 53.34,18.25 56.51,15.08 KEYBOARD.2
PD5
  Top 0.61: 35.55,36.03 36.82,37.3 36.82,41.74 39.36,44.28
  Top 0.813: IC8.2 35.55,36.03 | 39.36,44.28 62.86,44.28 67.31,39.84 IC1.15
  Bottom 0.406: 104.77,90 104.77,92.55 PD.6
  Bottom 0.61: IC1.15 79.37,39.84 81.91,42.38 81.91,81.11 83.81,83.02 102.86,83.02 104.77,84.92 104.77,90
  Bottom 1.27: IC8.3 IC8.2
PD6  (via drill 1.02 pad 1.68)
  Top 0.406: IC5.27 139.06,83.02 137.79,84.29 137.79,86.83 139.06,88.1 139.06,95.72 137.79,96.99 120.01,96.99 112.39,89.37 107.31,89.37 106.04,90.64 PD.7 | v82.55,37.94 81.91,37.3 81.91,25.23 83.81,23.33 93.97,23.33 98.42,18.88 116.2,18.88 v117.47,17.61 121.28,17.61 123.82,20.15 133.98,20.15 135.25,18.88 135.25,17.61 136.52,16.34 144.14,16.34 145.41,17.61 145.41,20.79 142.23,23.96 LCD.5
  Top 0.61: 13.33,29.68 25.39,29.68 26.03,29.04 36.19,29.04 38.09,30.95 38.09,40.48 40,42.38 61.59,42.38
  Top 0.813: IC2.2 12.7,23.33 11.43,24.6 11.43,27.77 13.33,29.68 | 61.59,42.38 66.67,37.3 IC1.16
  Bottom 0.406: v117.47,17.61 BUS.17
  Bottom 0.61: IC1.16 81.91,37.3 v82.55,37.94 83.18,38.57 83.18,79.84 85.08,81.75 104.13,81.75 106.04,83.66 PD.7
PD7  (via drill 1.02 pad 1.68)
  Top 0.406: v83.81,35.39 83.81,27.14 85.72,25.23 94.61,25.23 99.69,20.15 119.38,20.15 v120.01,19.52
  Top 0.61: 39.36,28.41 39.36,39.84 40,40.48 44.45,40.48
  Top 0.813: IC2.1 16.5,27.77 24.76,27.77 25.39,27.14 38.09,27.14 39.36,28.41 | 44.45,40.48 60.32,40.48 66.03,34.76 IC1.17
  Bottom 0.406: 107.31,90 107.31,92.55 PD.8 | v120.01,19.52 BUS.19
  Bottom 0.61: 107.31,80.48 86.36,80.48 84.45,78.58 84.45,36.03 v83.81,35.39 83.18,34.76 IC1.17 | 107.31,80.48 107.31,90 | IC5.22 139.06,70.32 137.16,72.22 137.16,80.48 135.25,82.39 135.25,86.83 133.98,88.1 118.74,88.1 112.39,83.02 112.39,81.75 111.12,80.48 107.31,80.48
PE  (via drill 0.61, 1.02 pad 1.68)  (2 unrouted)
  Top 0.813: 136.52,56.98 136.52,90 v137.16,90.64
  Top 1.27: C14.2 5.71,9.36 1.9,13.17 1.9,14.44 | C5.2 3.81,30.95 3.81,16.34 1.9,14.44 | 1.9,14.44 3.17,14.44 | SV1.4 SV1.6 SV1.8 SV1.10 37.46,85.56 POWER.4 | 3.17,61.43 R4.2 | IC3.8 IC3.6 46.98,62.7 43.17,66.51 43.17,81.11 46.98,84.92 54.6,84.92 C13.2 | IC1.20 63.49,27.14 59.68,30.95 IC8.5 | R15.1 138.43,10 JP1.1 144.14,10 | 100.33,14.44 100.33,13.81 105.41,8.73 108.58,8.73 109.85,7.46 109.85,4.28 112.39,1.74 142.87,1.74 145.41,4.28 145.41,8.73 | 145.41,8.73 144.14,10 | IC5.14 126.36,52.54 127.63,53.81 133.34,53.81 136.52,56.98 | 92.7,93.18 C11.2 | 92.7,93.18 92.07,93.81 | 92.07,93.81 89.53,93.81 86.99,91.28 PB.9 | C10.2 104.77,87.47 103.5,86.19 IC4.1 | 93.97,98.89 144.78,98.89 147.31,96.36 C9.2 158.11,90.64 159.38,89.37 159.38,15.71 153.66,10 146.68,10 | 93.97,98.89 92.7,97.62 | 92.7,97.62 92.7,94.45 | 92.7,94.45 92.7,93.18 | 92.7,94.45 92.07,93.81 | C15.2 64.77,90.64 63.49,91.91 | 63.49,91.91 63.49,97.62 66.03,100.16 86.99,100.16 88.26,98.89 91.44,98.89 | 91.44,98.89 93.97,98.89 | 91.44,98.89 92.7,97.62 | 63.49,91.91 63.49,88.1 | 145.41,8.73 145.41,10 146.04,10 | 146.68,10 146.04,10 | 146.04,10 144.14,10 | 146.68,10 145.41,8.73
  Top 2.184: C13.2 59.05,83.02 C15.2
  Top 3.81: 31.11,90.64 POWER.4 | 31.11,90.64 POWER.3 | 31.11,90.64 31.11,94.45 27.94,98.26 15.87,98.26 3.17,85.56 3.17,61.43 3.17,14.44
  Bottom 0.61: R11.A 142.23,21.42 140.97,22.7 138.43,22.7 137.16,23.96 LCD.1
  Bottom 0.813: 36.82,41.11 36.82,29.68 | 61.59,16.34 57.78,16.34 53.97,20.15 50.79,20.15 46.98,23.96 R14.1
  Bottom 1.27: R4.2 13.33,61.43 C3.1 17.14,62.7 | 17.14,62.7 Q2.1 20.95,62.06 21.59,61.43 27.3,61.43 | IC6.15 19.68,48.73 18.41,50 18.41,55.08 17.14,56.35 17.14,62.7 | 27.3,61.43 29.84,61.43 Q3.1 | 27.3,61.43 C12.2 30.48,53.17 30.48,44.28 31.75,43.02 34.92,43.02 36.82,41.11 | IC3.6 IC3.7 IC3.8 | C1.1 C2.1 26.67,1.1 | IC2.7 13.33,9.36 C14.2 6.98,3.64 9.52,1.1 26.67,1.1 | 41.91,28.41 38.09,28.41 36.82,29.68 | 41.91,28.41 IC8.5 | 41.91,28.41 45.71,28.41 R14.1 | 26.67,1.1 49.52,1.1 KEYBOARD.PE KEYBOARD.PE@ | BUS.21 BUS.23 128.9,26.5 LCD.1 | JP1.1 R11.A | C9.2 v137.16,90.64 | IC4.10 105.41,53.81 106.67,55.08 106.67,75.4 105.41,76.67 IC4.1 101.59,76.67 99.69,74.77 95.25,74.77 92.7,76.67 C11.2 | C10.2 109.85,90 PD.9
  Bottom 2.184: 37.46,91.91 38.73,93.18 IC7.GND 49.52,93.18 56.51,86.19 C13.2
  Bottom 3.81: POWER.3 POWER.4 34.92,89.37 37.46,91.91
  other vias: 56.51,83.02
RST
  Top 0.813: 34.28,62.7 39.36,57.62 41.91,57.62 47.62,51.91 65.4,51.91 68.58,55.08 IC1.9
  Top 1.27: D1.A 31.11,74.77 27.94,71.59 27.94,67.14 29.84,65.24 32.38,65.24 33.65,63.97 Q3.3 34.28,62.7
  Bottom 1.27: 26.03,77.94 R7.1 | D1.A 26.03,77.94 | 26.03,77.94 R8.1
RTN
  Top 1.27: JP1.2 138.43,7.46 136.52,5.55 R15.2 128.9,4.28 127.63,5.55 127.63,9.36 RS485.5
RX  (1 unrouted)
  Bottom 0.813: IC6.8 13.33,31.58 15.23,29.68 24.76,29.68 26.67,27.77 26.67,22.7 29.21,20.15 40.63,20.15 42.54,18.25 42.54,8.09 45.08,5.55 68.58,5.55 80,16.98 90.16,16.98 91.44,15.71 91.44,14.44 92.07,14.44
SCK
  Bottom 1.27: SV1.7 43.81,74.13 45.08,72.86 45.08,67.14 46.98,65.24 IC3.5
TX
  Bottom 0.813: 17.14,32.85 18.41,31.58 25.39,31.58 29.21,27.77 29.21,23.33 30.48,22.06 41.91,22.06 44.45,19.52 44.45,13.81 47.62,10.63 52.7,10.63 53.97,9.36 59.05,9.36 60.32,10.63 67.94,10.63 76.19,18.88 92.7,18.88 94.61,16.98 RS-232.3
  Bottom 1.27: IC6.7 15.87,36.03 17.14,34.76 17.14,32.85
V+
  Bottom 1.27: IC6.2 14.6,48.73 15.87,50 15.87,53.17 14.6,54.45 C6.2
V-
  Bottom 1.27: C5.1 6.98,37.3 8.25,38.57 IC6.6
VCC  (1 unrouted)
  Top 3.81: POWER.1 POWER.2 POWER.1
  Bottom 1.27: 41.27,96.99 IC7.IN | RS485.2 122.55,12.54 121.28,11.27 118.74,11.27 116.83,9.36 116.83,3.01 118.11,1.74 145.41,1.74 157.47,13.81 157.47,90 148.59,98.89 71.11,98.89 | 71.11,98.89 69.84,98.89 C15.1 | 71.11,98.89 67.94,98.89
  Bottom 2.184: 41.91,96.99 65.4,96.99 C15.1
  Bottom 3.81: POWER.1 20.95,90.64 | 20.95,90.64 POWER.2 | 20.95,90.64 20.95,94.45 24.76,98.26 40,98.26 | 40,98.26 41.27,96.99 | 40,98.26 67.31,98.26